# EAGLE board Duckuino (EAGLE 8.0.0)
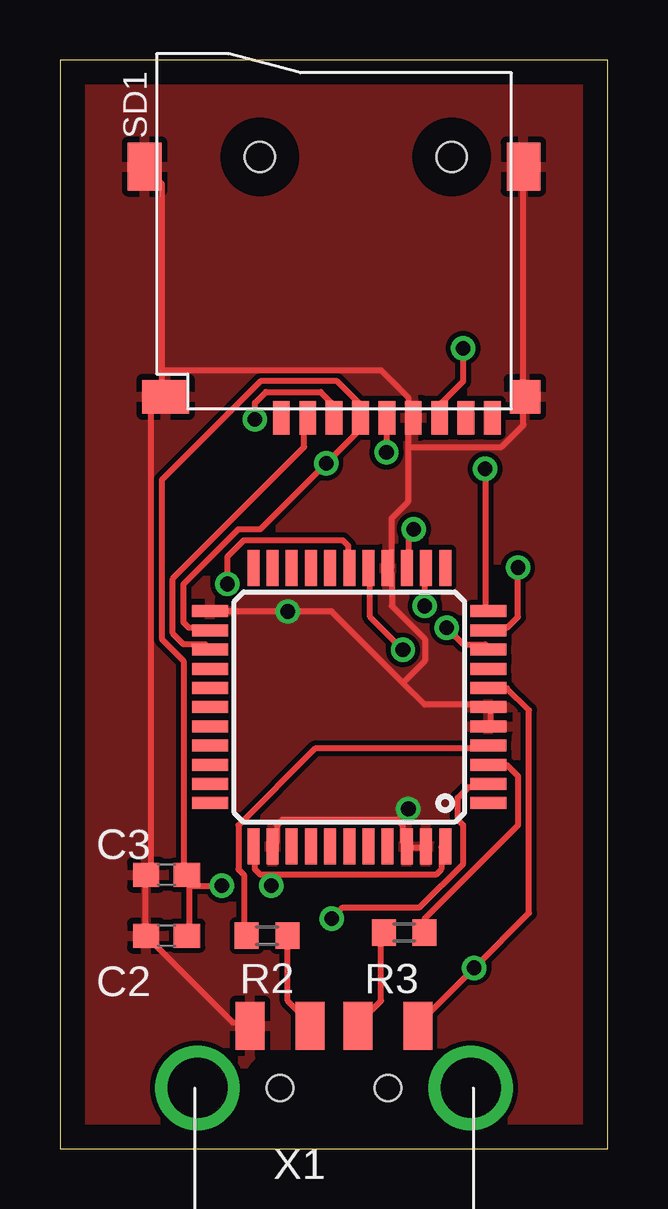
[diagram p0: board, top side]
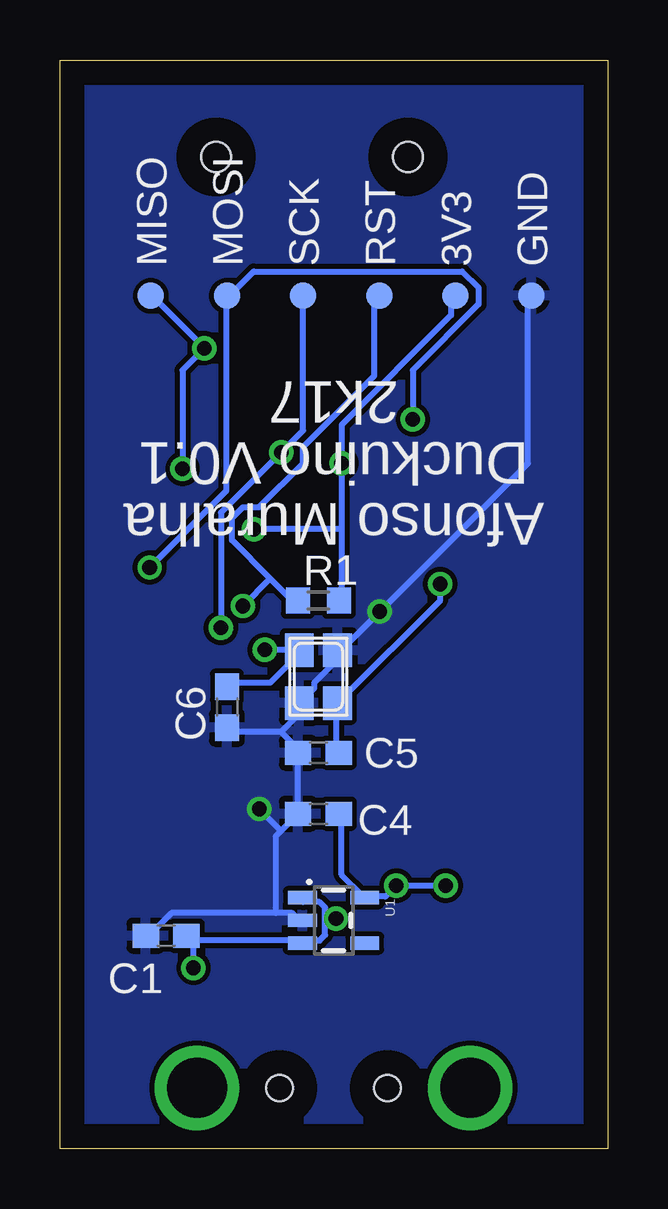
[diagram p1: board, bottom side, seen from below]

Size 22.84 x 45.39 mm. Coordinates in mm from the lower left corner, seen from the top.
Outline: 0,0 22.84,0 22.84,45.39 0,45.39 0,0
Copper layers (1*16): Top 0.035mm / dielectric 1.5mm / Bottom 0.035mm
Design rules "default": minimum track width 10mil, minimum drill 24mil, track to track 8mil, track to pad 8mil, pad to pad 8mil, via to via 8mil, smd to smd 8mil, copper to edge 40mil, drill to drill 8mil, minimum pad ring 10mil, minimum via ring 8mil, stop-mask expansion 4mil, vias tented up to drill 0mil, thermal gap 10mil
Net classes: 0 OSH: width 0.152 mm, drill 0.33 mm, clearance 0.152 mm

## Footprints (pad centres in the part's own frame; a part is rotated, then mirrored left to right if it is on the bottom)
TP11R = smd 1.1 x 1.1: TP 0,0
C0603 = smd 1.1 x 1: 1 -0.85,0; 2 0.85,0
NX3225 = smd 1.4 x 1.2: 1 -1.1,-0.8; 2 1.1,-0.8; 3 1.1,0.8; 4 -1.1,0.8
R0603 = smd 1 x 1.1: 1 -0.85,0; 2 0.85,0
TF-PULL = smd 0.7 x 1.4: 1 -2.2,-7.62; 2 -1.1,-7.62; 3 0,-7.62; 4 1.1,-7.62; 5 2.2,-7.62; 6 3.3,-7.62; 7 4.4,-7.62; 8 5.5,-7.62; 9 6.6,-7.62 | smd 1.4 x 2: S1 -7.9,2.85; S2 7.9,2.85 | smd 1.28 x 1.4: S3 7.96,-6.75 | smd 1.95 x 1.4: S4 -7.025,-6.75 | hole 1.25: -3.1,3.25; 4.9,3.25
SOT23-5 = smd 0.55 x 1.2: 1 -0.95,-1.3; 2 0,-1.3; 3 0.95,-1.3; 4 0.95,1.3; 5 -0.95,1.3
TQFP44 = smd 1.5 x 0.5: 1 -5.8,4; 2 -5.8,3.2; 3 -5.8,2.4; 4 -5.8,1.6; 5 -5.8,0.8; 6 -5.8,0; 7 -5.8,-0.8; 8 -5.8,-1.6; 9 -5.8,-2.4; 10 -5.8,-3.2; 11 -5.8,-4; 23 5.8,-4; 24 5.8,-3.2; 25 5.8,-2.4; 26 5.8,-1.6; 27 5.8,-0.8; 28 5.8,0; 29 5.8,0.8; 30 5.8,1.6; 31 5.8,2.4; 32 5.8,3.2; 33 5.8,4 | smd 0.5 x 1.5: 12 -4,-5.8; 13 -3.2,-5.8; 14 -2.4,-5.8; 15 -1.6,-5.8; 16 -0.8,-5.8; 17 0,-5.8; 18 0.8,-5.8; 19 1.6,-5.8; 20 2.4,-5.8; 21 3.2,-5.8; 22 4,-5.8; 34 4,5.8; 35 3.2,5.8; 36 2.4,5.8; 37 1.6,5.8; 38 0.8,5.8; 39 0,5.8; 40 -0.8,5.8; 41 -1.6,5.8; 42 -2.4,5.8; 43 -3.2,5.8; 44 -4,5.8
MOLEX_480371000 = smd 1.2 x 2: 1 3.5,2.6; 2 1,2.6; 3 -1,2.6; 4 -3.5,2.6 | drill 2.5: M1 -5.7,0; M2 5.7,0 | hole 1.1: -2.25,0; 2.25,0

## Placement (x,y rotation side)
3V3  TPTP11R  [TP11R]  6.35,35.56 90 bottom
C1  10uF  [C0603]  18.41,8.89 180 bottom
C2  10uF  [C0603]  4.45,8.89 180 top
C3  1uF  [C0603]  4.45,11.43 180 top
C4  0.1uF  [C0603]  12.06,13.97 180 bottom
C5  22pF  [C0603]  12.06,16.51 0 bottom
C6  22pF  [C0603]  15.88,18.41 270 bottom
GND  TPTP11R  [TP11R]  3.17,35.56 90 bottom
MISO  TPTP11R  [TP11R]  19.05,35.56 90 bottom
MOSI  TPTP11R  [TP11R]  15.88,35.56 90 bottom
Q1  16MHz  [NX3225]  12.06,19.68 90 bottom
R1  10KR  [R0603]  12.06,22.86 0 bottom
R2  22R  [R0603]  8.64,8.89 0 top
R3  22R  [R0603]  14.35,9.02 180 top
RST  TPTP11R  [TP11R]  9.53,35.56 90 bottom
SCK  TPTP11R  [TP11R]  12.7,35.56 90 bottom
SD1  TF-HOLDER  [TF-PULL]  11.43,38.1 0 top
U1  MIC5219 3.3V  [SOT23-5]  11.43,9.53 270 bottom
U$1  ATMEGA32U4-AU  [TQFP44]  12.06,18.41 180 top
X1  USB-A  [MOLEX_480371000]  11.43,2.54 0 top

## Library data of the parts
3V3 GND MISO MOSI RST SCK = testpad
C1-C6 = rcl
Q1 U$1 X1 = adafruit
R1-R3 = eagle-ltspice; SPICEMODEL: NONE; SPICEPREFIX: R
SD1 = sd
U1 = SparkFun-IC-Power; PROD_ID: VREG-09872

## Nets
3V3: 3V3.TP C2.1 C3.1 C4.1 R1.2 SD1.4 U1.5 U$1.14 U$1.24 U$1.34 U$1.44
6/A7: U$1.27
A0: U$1.36
A1: U$1.37
A2: U$1.38
A3: U$1.39
D0/RX: U$1.20
D1/TX: U$1.21
D2/SDA: U$1.19
D3: U$1.18
D4/A6: SD1.2 U$1.25
D5: U$1.31
D7: U$1.1
D8/A8: U$1.28
D9/A9: U$1.29
D10/A10: U$1.30
D14/MISO: MISO.TP SD1.7 U$1.11
D15/SCK: SCK.TP SD1.5 U$1.9
D16/MOSI: MOSI.TP SD1.3 U$1.10
D+: R2.1 U$1.4
D-: R3.1 U$1.3
GND: C1.2 C2.2 C3.2 C4.2 C5.1 C6.2 GND.TP Q1.2 Q1.4 SD1.6 SD1.S1 SD1.S2 SD1.S3 SD1.S4 U1.2 U$1.5 U$1.6 U$1.15 U$1.23 U$1.35 U$1.42 U$1.43 X1.4
N$2: U$1.41
N$3: R2.2 X1.3
N$4: R3.2 X1.2
N$5: C6.1 Q1.3 U$1.16
N$6: U$1.40
N$7: C5.2 Q1.1 U$1.17
N$12: U$1.33
N$15: U$1.32
N$16: U$1.12
N$23: U$1.8
N$25: U$1.26
N$26: U$1.22
RST: R1.1 RST.TP U$1.13
UVCC: C1.1 U1.1 U1.3 U$1.2 U$1.7 X1.1

## Tracks (layer width: path | path; a pad name or v marks a point on that pad's centre or on a via)
3V3  (via drill 0.61)
  Top 0.254: v14.76,25.83 14.53,25.6 14.53,24.23 U$1.14 | 8.81,11.43 15.67,11.43 15.9,11.66 15.9,12.57 U$1.44 | 8.81,11.43 8.36,11.43 8.13,11.66 8.13,12.57 U$1.34 | 8.81,11.43 v8.81,10.97 | 5.38,10.97 5.38,11.43 C3.1 | 5.38,10.97 5.38,8.91 C2.1 | U$1.24 6.07,21.72 5.38,21.72 5.16,21.95 5.16,23.55 7.44,25.83 8.36,25.83 v11.1,28.57 12.47,29.95 12.47,30.4 SD1.4 12.47,30.63 12.47,31.09 11.56,32 8.36,32 4.24,27.89 4.24,21.26 5.16,20.34 5.16,11.43 C3.1 | 5.38,10.97 v6.76,10.97 | 5.38,10.97 C3.1
  Bottom 0.254: 11.1,25.83 v11.1,28.57 11.1,30.18 6.53,34.75 6.53,35.43 3V3.TP | 11.1,25.83 11.1,22.86 R1.2 | 11.1,25.83 v14.76,25.83 | C4.1 11.1,13.95 11.1,11.43 10.19,10.52 U1.5 9.96,10.52 9.27,10.52 v8.81,10.97 v6.76,10.97
D4/A6
  Top 0.254: SD1.2 10.19,30.4 10.19,29.26 4.7,23.77 4.7,21.49 5.16,21.03 6.07,21.03 U$1.25
D14/MISO  (via drill 0.61)
  Top 0.254: v16.82,33.38 16.82,32 15.9,31.09 15.9,30.63 SD1.7 | v17.73,28.35 17.73,22.63 U$1.11
  Bottom 0.254: MISO.TP 18.87,35.43 v16.82,33.38 17.73,32.46 v17.73,28.35
D15/SCK  (via drill 0.61)
  Top 0.254: v13.61,29.03 13.61,30.4 SD1.5 | v16.13,21.72 16.82,21.03 17.73,21.03 U$1.9
  Bottom 0.254: SCK.TP 12.7,29.95 v13.61,29.03 16.13,26.52 v16.13,21.72
D16/MOSI  (via drill 0.61)
  Top 0.254: v19.1,24.23 19.1,22.17 18.64,21.72 17.96,21.72 U$1.10 | v8.13,30.4 8.13,31.09 8.59,31.55 10.87,31.55 11.33,31.09 11.33,30.63 SD1.3
  Bottom 0.254: v19.1,24.23 15.9,27.43 15.9,35.43 MOSI.TP 15.67,35.66 14.76,36.58 6.07,36.58 5.38,35.89 5.38,35.2 8.13,32.46 v8.13,30.4
D+
  Top 0.254: R2.1 7.67,8.91 7.67,11.43 7.44,11.66 7.44,13.49 10.64,16.69 17.73,16.69 U$1.4
D-
  Top 0.254: R3.1 15.21,9.14 15.21,9.6 19.1,13.49 19.1,15.54 18.64,16 17.96,16 U$1.3
GND  (via drill 0.61)
  Top 0.254: 14.07,13.72 9.27,13.72 9.04,13.49 9.04,12.8 U$1.35 | 14.07,13.72 14.3,13.49 14.3,12.8 U$1.42 14.53,12.57 15.21,12.57 U$1.43 | v14.53,14.17 14.07,13.72 | U$1.5 17.96,17.83 17.96,18.29 U$1.6 17.73,18.52 15.21,18.52 14.3,19.43 | 14.3,19.43 11.33,22.4 v9.5,22.4 6.3,22.4 U$1.23 | 14.53,29.26 14.53,26.98 13.84,26.29 13.84,24.23 U$1.15 13.84,24 13.84,22.63 15.21,21.26 15.21,20.34 14.3,19.43 | 14.53,29.26 14.53,30.4 SD1.6 14.53,30.63 14.53,31.32 13.39,32.46 4.24,32.46 | 14.53,29.26 18.41,29.26 19.33,30.18 19.33,31.32 SD1.S3 19.33,31.55 19.33,40.92 SD1.S2 | X1.4 7.9,5.26 7.21,5.26 3.79,8.69 C2.2 3.56,8.91 3.56,11.43 C3.2 3.79,11.43 3.79,30.86 4.24,31.32 SD1.S4 4.24,31.55 4.24,32.46 | 4.24,32.46 4.24,40.23 3.56,40.92 SD1.S1
  Bottom 0.254: 13.84,9.83 13.16,9.83 12.93,9.6 U1.2 | 13.84,9.83 18.19,9.83 19.1,8.91 C1.2 | 13.61,17.37 15.67,17.37 C6.2 | 13.61,17.37 12.93,16.69 C5.1 12.93,16.46 12.93,14.17 C4.2 12.93,13.95 13.61,13.26 | 13.61,17.37 12.93,18.06 12.93,18.52 Q1.4 12.7,18.75 12.24,19.2 12.24,19.43 11.1,20.57 Q1.2 11.1,20.8 v9.5,22.4 3.33,28.57 3.33,35.43 GND.TP | 13.84,9.83 13.84,13.03 13.61,13.26 | 13.61,13.26 v14.53,14.17
  pour Top: 0,0 22.86,0 22.86,45.72 0,45.72
  pour Bottom: 0,0 22.86,0 22.86,45.72 0,45.72
N$3
  Top 0.254: R2.2 9.5,8.69 9.5,6.17 10.41,5.26 X1.3
N$4
  Top 0.254: R3.2 13.39,8.91 13.39,6.17 12.47,5.26 X1.2
N$5  (via drill 0.61)
  Top 0.254: v14.3,20.8 12.93,22.17 12.93,24 U$1.16
  Bottom 0.254: C6.1 15.67,19.43 14.07,19.43 12.93,20.57 Q1.3 12.93,20.8 v14.3,20.8
N$7  (via drill 0.61)
  Top 0.254: v6.99,23.55 6.99,24.69 7.67,25.38 11.79,25.38 12.01,25.15 12.01,24.23 U$1.17
  Bottom 0.254: C5.2 11.33,16.69 11.33,18.52 Q1.1 11.1,18.75 6.99,22.86 v6.99,23.55
RST  (via drill 0.61)
  Top 0.254: v15.21,22.63 15.21,24 U$1.13
  Bottom 0.254: 14.07,23.77 13.16,22.86 R1.1 | 14.07,23.77 15.67,25.38 15.67,26.29 15.21,26.75 14.53,26.75 12.7,28.57 12.7,29.26 9.73,32.23 9.73,35.43 RST.TP | 14.07,23.77 v15.21,22.63
UVCC  (via drill 0.61)
  Top 0.254: v11.33,9.6 11.79,10.06 14.99,10.06 16.82,11.89 16.82,13.49 16.59,13.72 16.59,14.63 17.04,15.09 17.73,15.09 U$1.2 | U$1.7 17.96,19.2 18.64,19.2 19.56,18.29 19.56,9.83 v17.27,7.54 14.99,5.26 X1.1
  Bottom 0.254: 17.27,8.69 12.93,8.69 U1.3 12.7,8.69 12.01,8.69 11.79,8.91 11.79,9.6 | 17.27,8.69 17.5,8.69 C1.1 17.27,8.69 | 11.79,9.6 11.79,10.06 12.01,10.29 12.7,10.29 U1.1 | 11.79,9.6 v11.33,9.6 | v17.27,7.54 17.27,8.69

## Text on the board
bNames: 2k17 | Duckuino V0.1 | Afonso Muralha